# Altium PCB IMU_PCB_20241_VIAS02.PcbDoc
Units mm, origin at the board's own origin, x right, y up, seen from the top; angles counter-clockwise.
Board outline 9 x 7 mm, 2 copper layers (Top Layer, Bottom Layer), stack 0.325 mm thick; 16 components, 20 nets, 87 pads, 31 vias.
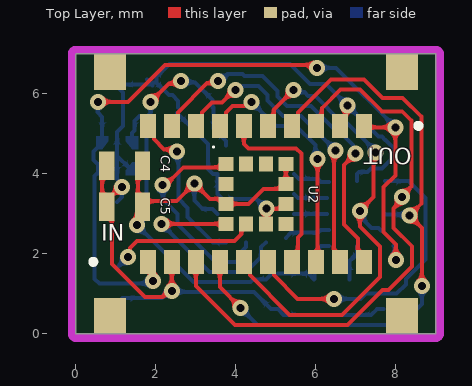
[diagram p0: Top Layer view]
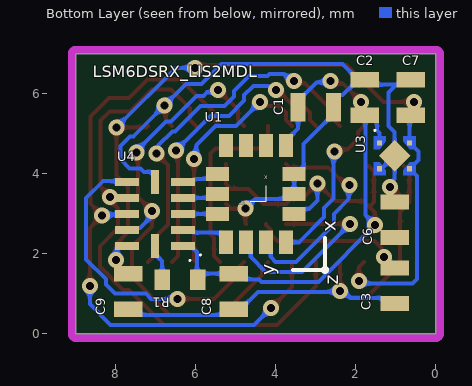
[diagram p1: Bottom Layer view, seen from below]
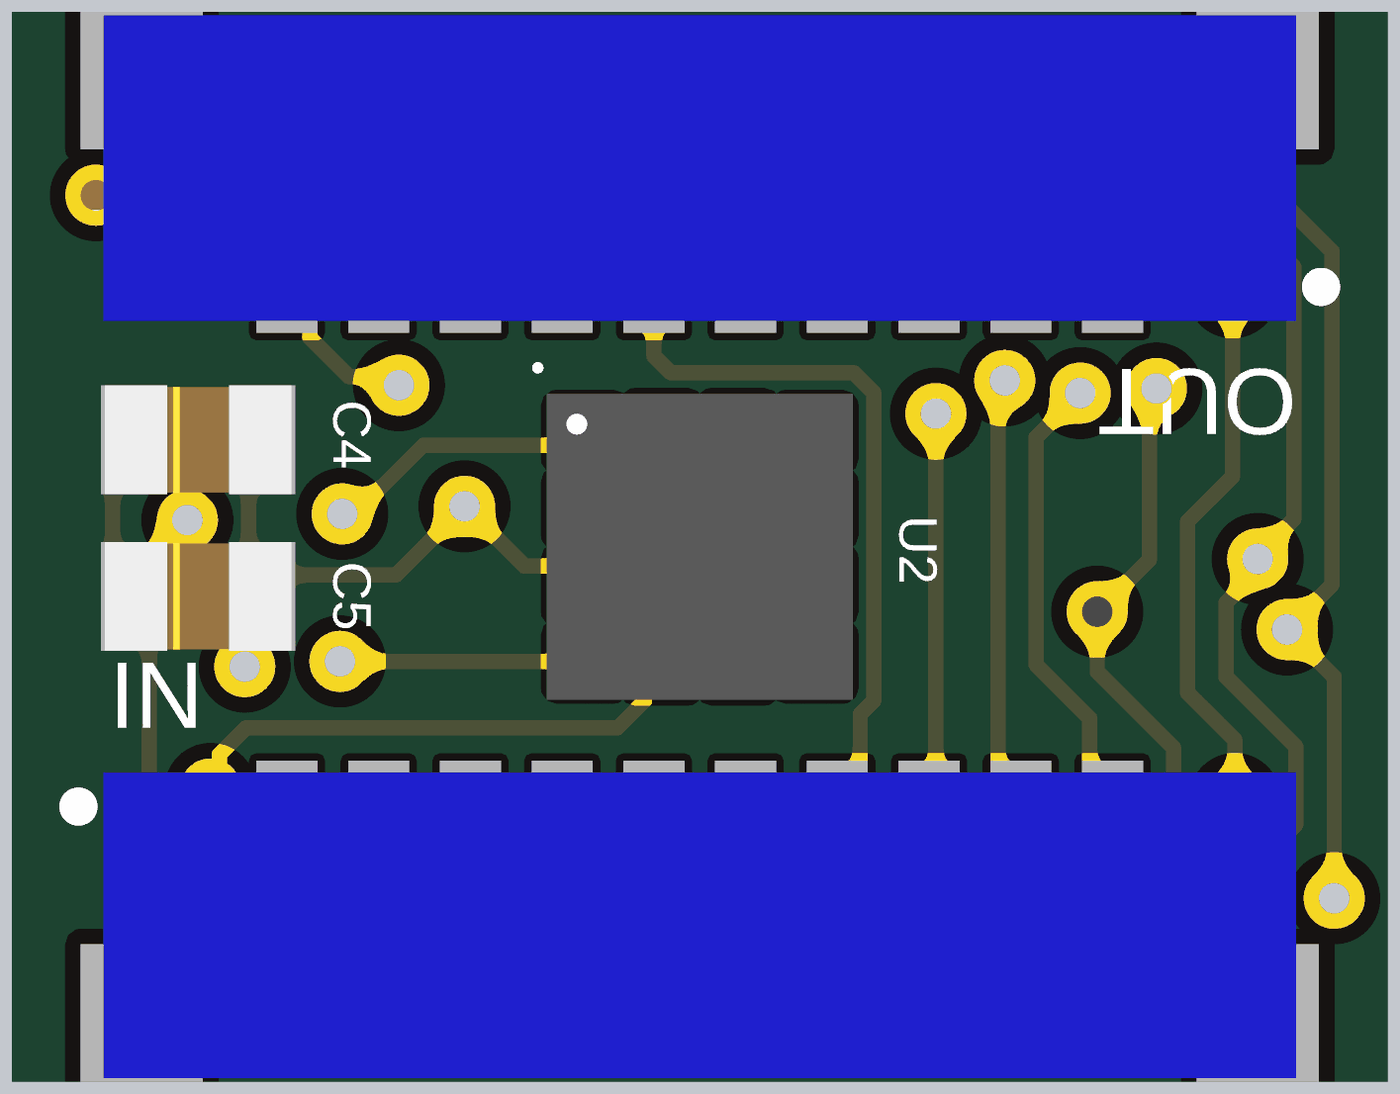
[diagram p2: 3D render of the assembled board from above, using the file's embedded part models]
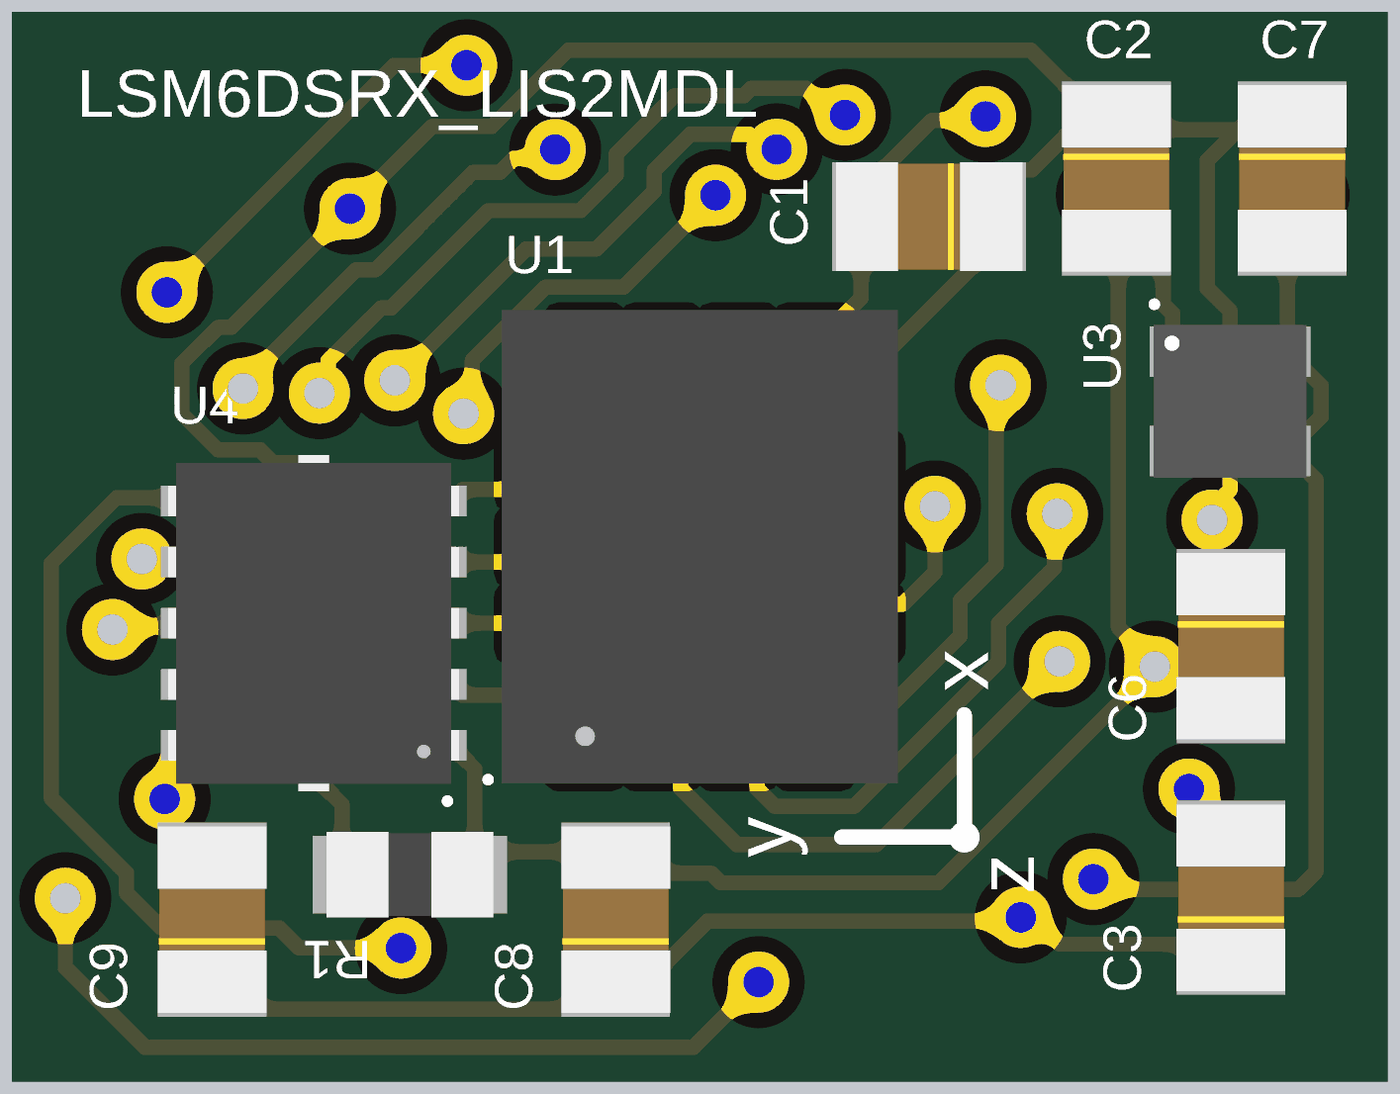
[diagram p3: 3D render of the assembled board from below, using the file's embedded part models]

## Layer stack, top to bottom
Top Solder: solder mask 0.0102, Solder Resist, Dk 3.5
Top Layer: signal copper 0.0356
Dielectric 1: core 0.254, FR-4, Dk 4.2
Bottom Layer: signal copper 0.0356
Solder Side: solder mask 0.0102, Solder Resist, Dk 3.5

## Board outline
0,7 0,0 9,0 9,7

## Design rules (kind name [scope] priority, off if disabled: settings)
Clearance Clearance_tracks [All] p1: gap=0.1 ignorepadtopadclearanceinfootprint=FALSE except(0: Arc-Hole Track-Hole SMDPad-Hole THPad-Hole Via-Hole Fill-Hole Poly-Hole Region-Hole Text-Hole; 0.15: Arc-Arc Arc-Track Arc-SMDPad Arc-THPad Arc-Via Arc-Fill Arc-Poly Arc-Region Track-Track Track-SMDPad Track-THPad Track-Via Track-Fill Track-Poly Track-Region)
Clearance Clearance_3 [OnLayer('Power Plane (VCC)') or InNet('4V')] p2: gap=0.254 ignorepadtopadclearanceinfootprint=FALSE except(0: Arc-Hole Track-Hole SMDPad-Hole THPad-Hole Via-Hole Fill-Hole Poly-Hole Region-Hole Text-Hole)
Clearance Clearance_2 [(InComponent('MPU-9250') AND OnLayer('Bottom Layer') AND HasFootprint('MPU-2950'))] p3: gap=0.1 ignorepadtopadclearanceinfootprint=FALSE except(0: Arc-Hole Track-Hole SMDPad-Hole THPad-Hole Via-Hole Fill-Hole Poly-Hole Region-Hole Text-Hole)
Clearance keepout [OnLayer('Keep-Out Layer')] p4: gap=0.1 ignorepadtopadclearanceinfootprint=FALSE except(0: Arc-Hole Track-Hole SMDPad-Hole THPad-Hole Via-Hole Fill-Hole Poly-Hole Region-Hole Text-Hole)
Clearance "Clearance - Vias Pad" [IsVia vs IsPad] p5: gap=0.1 ignorepadtopadclearanceinfootprint=FALSE except(0: Arc-Hole Track-Hole SMDPad-Hole THPad-Hole Via-Hole Fill-Hole Poly-Hole Region-Hole Text-Hole)
Clearance "Clearance Pad to Pad" [IsPad vs IsPad] p6: gap=0.1 ignorepadtopadclearanceinfootprint=FALSE except(0: Arc-Hole Track-Hole SMDPad-Hole THPad-Hole Via-Hole Fill-Hole Poly-Hole Region-Hole Text-Hole)
Clearance [All] p7: gap=0.1 ignorepadtopadclearanceinfootprint=FALSE except(0: Arc-Hole Track-Hole SMDPad-Hole THPad-Hole Via-Hole Fill-Hole Poly-Hole Region-Hole Text-Hole)
DiffPairsRouting [All] p1: maxlimit=0.254 minlimit=0.254 mostfreqgap=0.254 toplayer_minwidth=0.2 toplayer_maxwidth=0.381 toplayer_prefwidth=0.254 bottomlayer_minwidth=0.2 bottomlayer_maxwidth=0.381 bottomlayer_prefwidth=0.254 maxuncoupledlength=12.7
HoleToHoleClearance [All] p1: gap=0.1 allowstackedmicrovias=TRUE
MinimumSolderMaskSliver [All] p1: minsoldermaskwidth=0.02
PlaneConnect [All] p1: planeconnectstyle=Direct reliefexpansion=0.508 reliefentries=4 reliefconductorwidth=0.254 reliefairgap=0.254
PolygonConnect [All] p1: connectstyle=Direct reliefconductorwidth=0.254 reliefentries=4 polygonreliefangle="90 Angle" airgapwidth=0.254
RoutingLayers RoutingLayersPWR [(InNet('4V') OR InNet('5V') OR InNet('5V NON ISOLATED'))] p2: top layer_v5=TRUE bottom layer_v5=TRUE
RoutingPriority "RountingPriority Power" [(InNet('GND') OR InNet('POWER GND') OR InNet('5V') OR InNet('5V NON ISOLATED') OR InNet('24V'))] p1: routingpriority=10
RoutingPriority "RoutingPriority RS485" [(InNet('RS485_N') OR InNet('RS485_P'))] p2: routingpriority=8
RoutingPriority "RoutingPriority Hard Ones" [(InNet('SIGNAL 1 A') OR InNet('SIGNAL 1 B') OR InNet('SIGNAL 1 C') OR InNet('SIGNAL 3 A') OR InNet('SIGNAL 3 B') OR InNet('SIGNAL 3 C'))] p3: routingpriority=6
RoutingPriority [All] p4: routingpriority=0
RoutingVias [All] p1: holewidth=0.2 width=0.4 viastyle="Through Hole" minholewidth=0.2 minwidth=0.4 maxholewidth=0.35 maxwidth=0.7
SMDNeckDown [All] p1: percent=90.000
SilkToSilkClearance [All] p1: silktosilkclearance=0.1
SilkToSolderMaskClearance SilkscreenOverComponentPads [IsPad] p1: minsilkscreentomaskgap=0.02 clearancetoexposedcopper=FALSE
SolderMaskExpansion SolderMaskExpansion_via [IsVia] p1: expansion=-0.4 istentingtop=FALSE
SolderMaskExpansion [All] p2: expansion=0.102 istentingtop=FALSE
Width [All] p1: maxlimit=2 minlimit=0.1 preferedwidth=0.1 minimp=50.000000 maximp=50.000000 favimp=50.000000
Width "Width PowerPlane" [All] p2: maxlimit=0.635 minlimit=0.508 preferedwidth=0.508
23 further rules are at their usual default settings.

## Components (designator, comment, footprint, x,y, rotation, side; value= is the part's Value field where it differs from the comment)
C1 "100nF" C0402 3,5.66 r0 bottom
C2 "100nF" C0402 1.775,5.909 r270 bottom
C3 "220nF" C0402 1.025,1.204 r90 bottom
C4 "100nF" C0402 1.22,4.2 r0 top
C5 "10uF" C0402 1.22,3.175 r0 top
C6 "1uF" C0402 1.025,2.85 r270 bottom
C7 "1uF" C0402 0.625,5.909 r270 bottom
C8 "100nF" C0402 5.05,1.06 r90 bottom
C9 "100nF" C0402 7.69,1.06 r90 bottom
IN "JST SM10B-XSRS-ETB" SM10B-XSRS-ETB 4.5,1.8 r0 top locked
OUT "JST SM10B-XSRS-ETB" SM10B-XSRS-ETB 4.5,5.2 r180 top
R1 "10K" R0402 9.871,1.98 r180 bottom
U1 "LSM6DSRXTR" LSM6 4.5,3.5 r90 bottom locked
U2 "LIS2MDLTR" LIS 4.5,3.5 r0 top locked
U3 "LD39020ADTPU18R" LD3 1.031,4.451 r180 bottom
U4 "HPA01164RUTR" RUT12 7.025,3 r0 bottom

## Footprints (in the part's own frame and the unit in brackets; to place one, negate y for a bottom-side part, rotate by r counter-clockwise, add the part's x,y. Pads: shape width x height; smd on the part's side, far side on the other; paste and mask are expansions set on the pad)
C0402 [mil]
  rect 15x28 smd paste+0 mask+0: 1(-17.5,0) 2(17.5,0)
  body extent -24,-14 24,14, height 28
LD3 [mil]
  rect 5x5 smd paste-2.5 mask-2.5: 1(-14.75,12.75) 2(-14.75,-12.75) 3(14.75,-12.75) 4(14.75,12.75)
  rect 22x22 smd rot 45 paste-11 mask+0: 5(0,0)
  Top Layer region: 0,11 0,11 0,11 0,11 0,11 0,11 0,11 0,11
  Top Layer region: 0,-11 0,-11 0,-11 0,-11 0,-11 0,-11 0,-11 0,-11
  Top Layer region: 20.75,19.25 20.75,6.25 14.75,6.25 8.75,14.25 8.75,19.25
  Top Layer region: -20.75,-19.25 -20.75,-6.25 -14.75,-6.25 -8.75,-14.25 -8.75,-19.25
  Top Layer region: 20.75,-19.25 20.75,-6.25 14.75,-6.25 8.75,-14.25 8.75,-19.25
  Top Layer region: -20.75,19.25 -20.75,6.25 -14.75,6.25 -8.75,14.25 -8.75,19.25
  silkscreen extent -20,25 -19,25, body extent -20,-20 20,20, height 16
LIS [mm]
  rect 0.377x0.352 smd paste+0 mask+0.102: 1(-0.75,0.75) 2(-0.75,0.25) 3(-0.75,-0.25) 4(-0.75,-0.75) 7(0.75,-0.75) 8(0.75,-0.25) 9(0.75,0.25) 10(0.75,0.75)
  rect 0.352x0.377 smd paste+0 mask+0.102: 5(-0.25,-0.75) 6(0.25,-0.75) 11(0.25,0.75) 12(-0.25,0.75)
  silkscreen extent -1.07,1.16 -1.05,1.18, body extent -1,-1 1,1, height 0.7
LSM6 [mm]
  rect 0.577x0.352 smd paste+0 mask+0.102: 1(-1.21,0.75) 2(-1.21,0.25) 3(-1.21,-0.25) 4(-1.21,-0.75) 8(1.21,-0.75) 9(1.21,-0.25) 10(1.21,0.25) 11(1.21,0.75)
  rect 0.352x0.577 smd paste+0 mask+0.102: 5(-0.5,-0.956) 6(0,-0.956) 7(0.5,-0.956) 12(0.5,0.956) 13(0,0.956) 14(-0.5,0.956)
  silkscreen extent -1.54,-0.25 0.2,1.4, body extent -1.55,-1.3 1.55,1.3, height 0.87
R0402 [mil]
  rect 15x20 smd paste+0 mask+0: 1(119.31,-24.61) 2(154.31,-24.61)
  body extent 115,-36 158,-14, height 16
RUT12 [mm]
  rect 0.6x0.2 smd paste+0 mask+0: 1(-0.7,0.8) 2(-0.7,0.4) 3(-0.7,0) 4(-0.7,-0.4) 5(-0.7,-0.8) 7(0.7,-0.8) 8(0.7,-0.4) 9(0.7,0) 10(0.7,0.4) 11(0.7,0.8)
  rect 0.2x0.6 smd paste+0 mask+0: 6(0,-0.8) 12(0,0.8)
  silkscreen extent -0.89,1.15 -0.86,1.18, body extent -0.95,-1.1 0.95,1.1, height 0.6
SM10B-XSRS-ETB [mm] "JST XSR 10WAY angle, 0.6mm, SMD"
  rect 0.4x0.6 smd mask+0.05: 1(-2.7,0) 2(-2.1,0) 3(-1.5,0) 4(-0.9,0) 5(-0.3,0) 6(0.3,0) 7(0.9,0) 8(1.5,0) 9(2.1,0) 10(2.7,0)
  rect 0.8x0.9 smd: NC(-3.65,-1.35) NC(3.65,-1.35)
  silkscreen extent -4.11,-0.05 -4.01,0.05, body extent -3.9,-1.78 3.9,0.22, height 1.44

## Part data
C1 C2 C4 C8 C9: library part 04025C104KAT4A, "04025C104KAT4A", Mfr_Name=TDK
C3: library part C1005X5R1E224K050BC, "C1005X5R1E224K050BC", Mfr_Name=TDK
C5: library part 0402ZD106MAT2A, "0402ZD106MAT2A", Mfr_Name=TDK
C6 C7: library part 04023D105KAT2A, "04023D105KAT2A", Mfr_Name=TDK
IN OUT: library part SM10B-XSRS-ETB, "JST 10WAY angle XSR, SMT, 0.6mm, SM10B-XSRS-ETB", Manufacturer=JST, Supplier Part Number 1=90W0858, Catalogue Price=1,192, Category=Connecteurs, ComponentLink1Description=http://datasheet.octopart.com/SM10B-XSRS-ETB-JST-datasheet-12514066.pdf, ComponentLink1URL=http://datasheet.octopart.com/SM10B-XSRS-ETB-JST-datasheet-12514066.pdf, ComponentLink2Description=http://www.farnell.com/datasheets/1706598.pdf, ComponentLink2URL=http://www.farnell.com/datasheets/1706598.pdf, Contact Material=Copper, Contact Plating=Tin, Contact Termination Type="Through Hole", contact_material=Copper, contact_plating=Tin, Courant=0.2A, Currency=EUR, gender=Male, Manufacturer Part Number=SM10B-XSRS-ETB, Matériau du contact="Alliage de cuivre", Minimum Order Quantity=5, mounting_style="Through Hole", Méthode de raccordement="Montage en surface", No. of Contacts=10, No. of Rows=1, Nombre de contacts=10, Nombre de rangées=1, number_of_contacts=10, Numéro de série=SM10B, Octopart Url=http://octopart.com/sm10b-xsrs-etb-jst-29522047, OctopartID=60b7a87f3daebf70, Orientation du corps=Droit, Pas=0.6mm, Pitch Spacing=0.6, Product Range="XSR Series", Product Status=IN_STOCK, Product StockNumber=820-1677, RoHS=YES, rohs_status=Compliant, Seller Landing  Url=https://octopart-clicks.com/click/track?country=IT&ak=8157f166&sig=06796d5&sid=2402&ppid=29522047&vpid=200245201&ct=offers, Stock 1=0, Stock 2=0, Supplier 1=Newark, Supplier 2=RS-Components, Supplier Part Number 2=820-1677, Séries=XSR, Tension="30 V c.a./c.c.", Type="Fil à carte"
R1: library part RMCF0402FT10K0, "No Description Available", Mfr_Name="Stackpole International"
U1 U2 U3: "No Description Available", Mfr_Name=STMicroelectronics, RefDes=RefDes, Type=Type
U4: "No Description Available", Mfr_Name="Texas Instruments", RefDes=RefDes, Type=Type

## Via types
v1: diameter 0.4, hole 0.2, Top Layer to Bottom Layer, 31 vias

## Nets (pads, with @x,y where several pads share a name; then routed paths per layer and width w, separated by ;. In a path a pad name is that pad's centre, name@x,y a point inside that pad or via, vN(x,y) a via of type N, cw(c..) or ccw(c..) an arc to the next point about the centre after c; other vN are vias at no path point)
1V8: C1.2 C2.2 C4.2 C5.2 C6.2 C8.2 R1.2 U1.5 U1.8 U2.3 U2.9 U2.10 U3.1 U4.1 | length 21.1
  Top Layer w0.1: v1(1.524,2.716) 1.524,3.035 C5.2 ; C4.2@1.689,4.2 1.549,4.059 1.549,3.29 C5.2 ; v1(1.869,5.8) 2.328,6.258 2.573,6.258 v1(2.631,6.316) ; U2.10 U2.9 5.126,3.626 4.688,3.626 4.312,3.25 U2.3 3.626,3.374 3.352,3.374 v1(2.961,3.765) 2.512,3.315 1.804,3.315 C5.2
  Bottom Layer w0.1: U3.1 1.406,5.025 1.469,5.088 1.469,5.324 1.59,5.445 1.761,5.445 1.761,2.973 1.524,2.736 v1(1.524,2.716) 2.938,1.301 4.362,1.301 4.425,1.364 4.754,1.364 C8.2@4.949,1.559 ; C2.2@1.792,5.448 1.869,5.525 v1(1.869,5.8) ; v1(2.631,6.316) 2.657,6.289 2.981,6.289 3.42,5.85 C1.2@3.42,5.66 ; v1(2.961,3.765) 2.961,3.335 3.173,3.124 3.419,3.124 U1.5 ; C1.2 3.445,5.128 3.75,4.823 U1.8 ; C8.2 5.811,1.505 5.952,1.364 R1.2 5.972,1.375 5.972,2.047 6.125,2.2 U4.1@6.325,2.2
CSI: IN.6 U4.7 | length 7.6
  Top Layer w0.1: IN.6 4.95,1.65 4.95,1.467 5.543,0.875 v1(6.454,0.875)
  Bottom Layer w0.1: v1(6.454,0.875) 7.12,0.875 7.252,1.006 8.02,1.006 8.25,1.236 8.25,1.366 8.742,1.857 8.742,3.393 8.315,3.82 U4.7@7.725,3.82
Csi_1V8: U1.12 U4.5 | length 1
  Bottom Layer w0.1: U1.12 5.581,3.876 6.049,3.876 6.125,3.8 U4.5@6.325,3.8
GND: C1.1 C2.1 C3.1 C4.1 C5.1 C6.1 C7.1 C8.1 C9.1 IN.2 OUT.2 U1.6 U1.7 U2.6 U2.8 U3.2 U3.5 U4.6 | length 32.7
  Top Layer w0.1: C4.1@0.8,4.2 0.66,4.059 0.66,3.29 C5.1@0.874,3.076 ; v1(1.149,3.675) 1.11,3.675 0.874,3.439 C5.1@0.874,3.076 ; IN.2 v1(2.4,1.075) 2.319,1.075 2.169,0.925 1.724,0.925 0.9,1.749 0.9,3.05 C5.1@0.874,3.076 ; U2.6 4.764,2.764 v1(4.764,3.136) ; 4.979,3.126 5.112,3.126 5.236,3.25 U2.8 ; OUT.2 6.75,5.35 6.75,5.674 v1(6.788,5.712)
  Bottom Layer w0.1: C7.1@0.865,6.345 0.981,6.229 ; C3.1 1.166,0.9 2.144,0.9 2.319,1.075 2.481,1.075 2.505,1.051 4.449,1.051 4.885,0.616 C8.1 5.191,0.475 6.288,0.475 7.384,0.475 7.535,0.626 C9.1@7.69,0.626 ; C6.1 1.149,3.418 1.149,3.756 1.031,3.873 U3.5 ; U3.2 1.392,4.141 1.342,4.141 U3.5 ; C2.1 C2.1@1.915,6.213 ; C2.1@2.044,6.25 2.328,5.966 2.415,5.966 2.556,5.825 C1.1 ; C1.1@2.531,5.52 3.305,4.745 3.305,4.126 3.431,4 U1.7 U1.6 3.668,3.376 4.509,3.376 4.748,3.136 v1(4.764,3.136) ; U4.6@7.025,3.82 7.025,4 7.075,4.05 7.292,4.05 7.378,4.135 7.653,4.135 7.887,4.37 7.887,4.701 7.738,4.85 7.734,4.85 7.649,4.935 7.565,4.935 6.25,6.25 5.86,6.25 5.36,6.75 2.336,6.75 2.015,6.429 2.015,6.281 1.947,6.281 1.894,6.229 0.981,6.229 ; 0.981,6.229 1.181,6.029 1.181,5.191 1.031,5.042 U3.5
INT1: OUT.10 U1.4 | length 4.1
  Top Layer w0.1: OUT.10 1.95,5.05 1.95,4.867 2.203,4.614 2.475,4.614 v1(2.532,4.557)
  Bottom Layer w0.1: v1(2.532,4.557) 2.561,4.528 2.561,3.382 2.796,3.147 2.796,2.917 3.424,2.29 U1.4
NetC3_2: C3.2 U2.5 | length 3.9
  Top Layer w0.1: v1(1.3,1.915) 1.357,1.972 1.357,2.14 1.533,2.316 3.963,2.316 4.138,2.491 4.138,2.612 4.25,2.723 U2.5
  Bottom Layer w0.1: C3.2 1.166,1.789 1.23,1.789 1.23,1.845 v1(1.3,1.915)
NetIN_7: IN.7 OUT.6 | length 4.8
  Top Layer w0.1: OUT.6 4.2,4.75 4.312,4.638 5.509,4.638 5.638,4.509 5.638,2.491 5.55,2.403 5.55,1.95 IN.7
NetIN_8: IN.8 OUT.7 | length 6.2
  Top Layer w0.1: OUT.7 3.75,5.35 3.75,5.533 3.917,5.7 4.215,5.7 4.315,5.8 v1(4.397,5.8) ; IN.8 6.045,1.845 v1(6.045,4.371)
  Bottom Layer w0.1: v1(4.397,5.8) 4.998,5.199 5.509,5.199 5.987,4.72 5.987,4.428 v1(6.045,4.371)
NetIN_9: IN.9 OUT.8 | length 7.6
  Top Layer w0.1: OUT.8 3.15,5.35 3.15,5.533 3.405,5.788 3.651,5.788 3.964,6.1 v1(3.997,6.1) ; v1(6.495,4.588) 6.45,4.543 6.45,1.95 IN.9
  Bottom Layer w0.1: v1(3.997,6.1) 4.078,6.1 4.178,6.2 4.562,6.2 4.797,5.966 4.797,5.828 5.176,5.449 5.635,5.449 v1(6.495,4.588)
NetIN_10: IN.10 OUT.9 | length 9.3
  Top Layer w0.1: OUT.9 2.55,5.35 2.55,5.533 3.285,6.268 3.493,6.268 v1(3.55,6.325) ; v1(6.988,4.505) 6.7,4.217 6.7,2.729 7.05,2.379 7.05,1.95 IN.10
  Bottom Layer w0.1: v1(3.55,6.325) 3.631,6.325 3.806,6.5 3.831,6.5 4.162,6.5 4.212,6.45 4.666,6.45 5.047,6.069 5.047,5.932 5.28,5.699 5.882,5.699 6.519,5.062 6.587,5.062 6.931,4.718 6.931,4.563 v1(6.988,4.505)
NetR1_1: R1.1 U4.12 | length 0.9
  Bottom Layer w0.1: R1.1 6.841,1.816 7.025,2 U4.12
NetU1_2: U1.2 U2.4 | length 5.2
  Top Layer w0.1: v1(2.146,2.75) U2.4
  Bottom Layer w0.1: v1(2.146,2.75) 3.345,1.551 4.259,1.551 4.626,1.919 4.626,2.165 U1.2
NetU1_3: U1.3 U2.1 | length 5.4
  Top Layer w0.1: v1(2.161,3.715) 2.243,3.715 2.692,4.165 3.665,4.165 U2.1
  Bottom Layer w0.1: v1(2.161,3.715) 2.179,3.698 2.179,3.365 2.546,2.998 2.546,2.746 3.491,1.801 4.009,1.801 4.126,1.919 4.126,2.051 4.25,2.176 U1.3
SCK: IN.3 OUT.3 U4.8 | length 14.3
  Top Layer w0.1: IN.3 3,1.201 3.976,0.225 6.792,0.225 7.667,1.1 7.816,1.1 8.4,1.684 8.4,2.19 7.942,2.648 7.942,3.133 8.149,3.34 v1(8.149,3.42) ; OUT.3 6.15,5.35 6.15,5.64 6.622,6.112 6.954,6.112 7.101,6.112 7.649,5.564 8.151,5.564 8.386,5.33 8.386,4.999 8.386,3.679 8.179,3.472 v1@8.179,3.391
SCK_1V8: U1.13 U4.4 | length 0.9
  Bottom Layer w0.1: U1.13 5.556,3.4 U4.4@6.285,3.4
SDI: IN.4 OUT.4 U4.9 | length 16.1
  Top Layer w0.1: IN.4 3.6,1.167 v1(4.115,0.651) ; OUT.4 5.55,5.35 5.55,5.533 6.379,6.362 7.205,6.362 7.669,5.898 8.171,5.898 8.636,5.434 8.636,3.252 v1(8.342,2.958) 8.65,2.65 v1(8.65,1.2)
  Bottom Layer w0.1: v1(4.115,0.651) 4.542,0.225 8.128,0.225 8.65,0.747 v1(8.65,1.2) ; U4.9 7.746,2.979 8.321,2.979 v1(8.342,2.958)
SDI_1V8: U1.14 U4.3 | length 0.8
  Bottom Layer w0.1: U1.14@5.456,3 U4.3@6.285,3
SDO: IN.5 OUT.5 U4.10 | length 12.6
  Top Layer w0.1: IN.5 4.35,1.65 4.35,1.467 5.343,0.475 6.657,0.475 7.6,1.417 7.6,2.183 7.1,2.683 v1(7.1,3.075) 7.442,3.417 7.442,4.49 v1(7.487,4.535) ; OUT.5 4.95,5.35 4.95,5.603 v1(5.446,6.099)
  Bottom Layer w0.1: v1(5.446,6.099) 5.503,6.041 5.715,6.041 5.808,5.949 5.986,5.949 6.622,5.312 6.747,5.312 7.487,4.572 v1(7.487,4.535) ; v1(7.1,3.075) 7.157,3.018 7.157,2.885 7.392,2.65 7.563,2.65 U4.10@7.626,2.587
SDO_1V8: U1.1 U4.2 | length 1.2
  Bottom Layer w0.1: U1.1@5.25,2.402 5.376,2.528 6.053,2.528 6.125,2.6 U4.2@6.325,2.6
VDD: C7.2 C9.2 IN.1 OUT.1 U3.3 U3.4 U4.11 | length 20
  Top Layer w0.1: v1(0.55,5.8) 1.304,5.8 2.229,6.725 5.869,6.725 5.944,6.65 v1(6.025,6.65) ; IN.1 1.925,1.675 v1(1.925,1.325) ; OUT.1 7.236,5.164 v1(7.986,5.164) 7.986,3.961 7.692,3.667 7.692,2.545 8,2.236 v1(8,1.85)
  Bottom Layer w0.1: v1(0.55,5.8) 0.55,5.531 0.657,5.424 U3.4 0.643,4.762 0.436,4.555 0.436,4.348 0.643,4.141 U3.3 0.643,4.114 0.469,3.94 0.469,1.375 0.587,1.258 1.777,1.258 1.844,1.325 v1(1.925,1.325) ; v1(6.025,6.65) 6.5,6.65 v1(7.986,5.164) ; U4.11@7.945,2.2 7.975,2.17 7.975,1.875 v1(8,1.85)
pads on no net: IN.NC OUT.NC U1.9 U1.10 U1.11 U2.2 U2.7 U2.11 U2.12

## Keep-outs
Keep-Out Layer:
  lines w0.2: -0.1,0 ccw(c0,0) 0,-0.1 ; -0.1,0 ccw(c0,0) 0,-0.1 ; -0.1,0 -0.1,7 ; -0.1,7 cw(c0,7) 0,7.1 ; -0.1,7 cw(c0,7) 0,7.1 ; 0,-0.1 9,-0.1 ; 0,7.1 9,7.1 ; 9,-0.1 ccw(c9,0) 9.1,0 ; 9,-0.1 ccw(c9,0) 9.1,0 ; 9,7.1 cw(c9,7) 9.1,7 ; 9,7.1 cw(c9,7) 9.1,7 ; 9.1,0 9.1,7

## Silkscreen, mask and mechanical layers (free items; w line width, h text height)
Bottom Overlay:
  circle w0.1: c2.77,1.6 r0.05
  lines w0.1: 2.77,2.4 2.77,1.6 3.57,1.6
  text "LSM6DSRX_LIS2MDL" at 8.575,6.314 h0.5
  text "x" at 2.895,2.556 h0.6 r90
  text "y" at 3.903,1.469 h0.6 r270
  text "z" at 2.314,1.228 h0.6 r270

## Text inside footprints (layer, text, board x,y; h text height)
U1: Bottom Overlay "X" at 4.199,3.822 h0.15; Bottom Overlay "Y" at 4.807,3.365 h0.15 r180